# Allegro board cmsis_dap_receive.brd
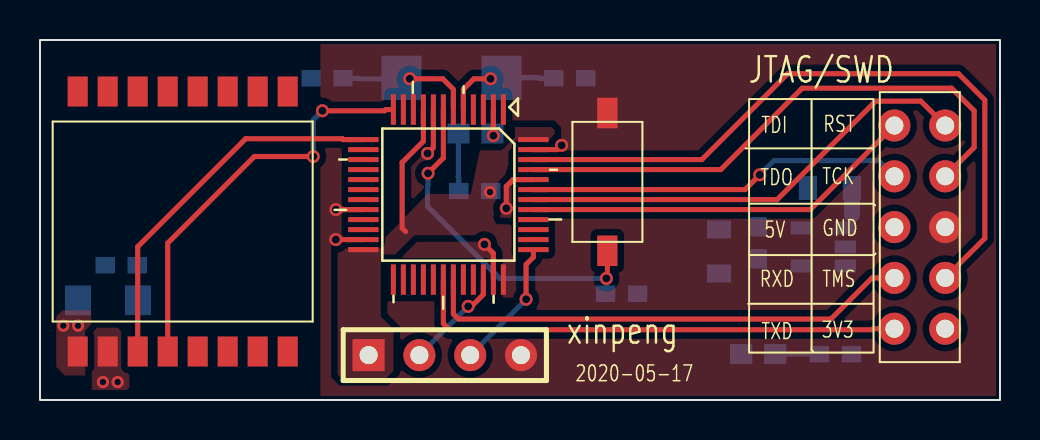
[diagram p0: board, top side]
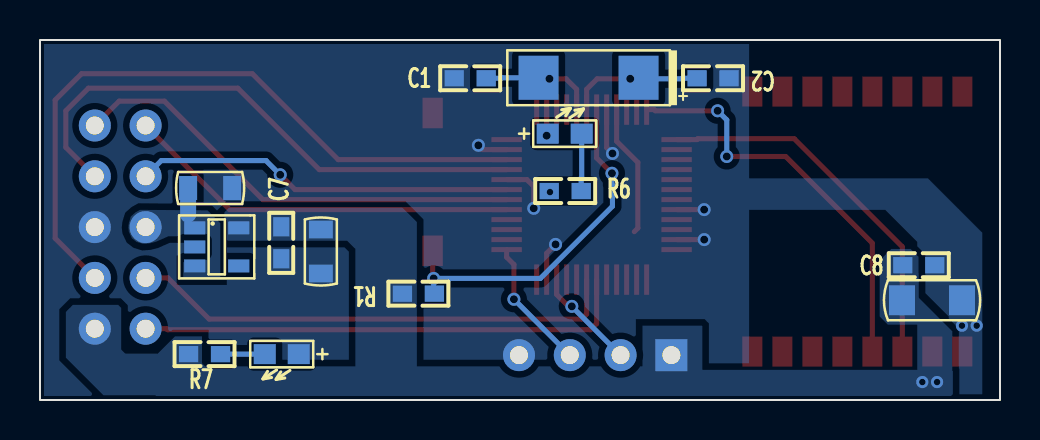
[diagram p1: board, bottom side, seen from below]

Outline 48 x 18 mm; copper layers: TOP, BOTTOM. Coordinates in mm from the lower left corner of the outline.
Outline path: rectangle 0,0 48,18

## Design rules (mm)
constraint set DEFAULT: min track width 0.254

## Placement (name value [footprint] x y rotation side)
C1  20p  [0603]  26.49 16.09 180 bottom
C2  20p  [0603]  14.35 16.09 0 bottom
C4  223  [C0805]  39.49 10.6 180 bottom
C6  223  [C0805]  33.96 7.43 90 bottom
C7  106  [0603]  35.94 7.86 90 bottom
C8  22u  [0603]  4.06 6.74 180 bottom
C9  22u  [C1206]  3.4 4.99 180 bottom
D2  LED  [LED0603]  21.76 13.32 180 bottom
D3  LED  [LED0603]  35.91 2.29 0 bottom
J1  4 HEADER  [SIP4]  16.43 2.24 0 top
J2  CON10C  [DIP5]  43.99 8.64 0 top
R1  10K  [0603]  29.08 5.32 0 bottom
R6  510R  [0603]  21.74 10.45 180 bottom
R7  510R  [0603]  39.77 2.29 180 bottom
SW1  RST  [KEY_SMD]  28.37 10.9 270 top
U1  STM32F103C8T6  [LQFP48]  20.42 10.27 270 top
U2  SPX3819M5-L-3-3  [SOT23-5]  39.16 7.65 270 bottom
U4  HC-25  [HC_25_SMT]  7.13 8.92 90 top
Y1  CRYSTAL13  [50322]  20.57 16.11 0 bottom

## Library data of the parts
C1 C2 C4 C6-C9 = CAP NP
D2 D3 = LED
J1 = 4 HEADER
J2 = CON10C
R1 R6 R7 = RESISTOR
SW1 = SW MAG-SPST/SM
U1 = STM32F103C8T6
U2 = SPX3819M5-L-3-3
U4 = HC-25_0
Y1 = CRYSTAL13_0

## Footprints (pads in the part's own frame, mm; a bottom-side part is the same pattern mirrored in y, then rotated)
0603
  rect 0.965x0.813 smd: 1(-0.8,0) 2(0.8,0)
50322
  rect 2x2.2 smd: 1(-2.5,0) 2(2.5,0)
C0805
  rect 0.9x1.2 smd: 1(-1.1,0) 2(1.1,0)
C1206
  rect 1.3x1.5 smd: 1(-1.5,0) 2(1.5,0)
DIP5
  round 1.6 hole 0.9: 1(-1.27,5.08) 2(-1.27,2.54) 3(-1.27,0) 4(-1.27,-2.54) 5(-1.27,-5.08) 6(1.27,-5.08) 7(1.27,-2.54) 8(1.27,0) 9(1.27,2.54) 10(1.27,5.08)
HC_25_SMT
  rect 1.5x1 smd: 1(-6.5,5.25) 2(-6.5,3.75) 3(-6.5,2.25) 4(-6.5,0.75) 5(-6.5,-0.75) 6(-6.5,-2.25) 7(-6.5,-3.75) 8(-6.5,-5.25) 9(6.5,-5.25) 10(6.5,-3.75) 11(6.5,-2.25) 12(6.5,-0.75) 13(6.5,0.75) 14(6.5,2.25) 15(6.5,3.75) 16(6.5,5.25)
KEY_SMD
  rect 1.524x1.016 smd: 1(-3.445,0) 2(3.445,0)
LED0603
  rect 1.1x1 smd: 1(-0.85,0) 2(0.85,0)
LQFP48
  rect 1.52x0.25 smd: 1(-4.25,2.75) 2(-4.25,2.25) 3(-4.25,1.75) 4(-4.25,1.25) 5(-4.25,0.75) 6(-4.25,0.25) 7(-4.25,-0.25) 8(-4.25,-0.75) 9(-4.25,-1.25) 10(-4.25,-1.75) 11(-4.25,-2.25) 12(-4.25,-2.75) 25(4.25,-2.75) 26(4.25,-2.25) 27(4.25,-1.75) 28(4.25,-1.25) 29(4.25,-0.75) 30(4.25,-0.25) 31(4.25,0.25) 32(4.25,0.75) 33(4.25,1.25) 34(4.25,1.75) 35(4.25,2.25) 36(4.25,2.75)
  rect 0.25x1.52 smd: 13(-2.75,-4.25) 14(-2.25,-4.25) 15(-1.75,-4.25) 16(-1.25,-4.25) 17(-0.75,-4.25) 18(-0.25,-4.25) 19(0.25,-4.25) 20(0.75,-4.25) 21(1.25,-4.25) 22(1.75,-4.25) 23(2.25,-4.25) 24(2.75,-4.25) 37(2.75,4.25) 38(2.25,4.25) 39(1.75,4.25) 40(1.25,4.25) 41(0.75,4.25) 42(0.25,4.25) 43(-0.25,4.25) 44(-0.75,4.25) 45(-1.25,4.25) 46(-1.75,4.25) 47(-2.25,4.25) 48(-2.75,4.25)
SIP4
  rect 1.6x1.6 hole 0.9: 1(0,0)
  round 1.6 hole 0.9: 2(2.54,0) 3(5.08,0) 4(7.62,0)
SOT23-5
  rect 0.65x1.06 smd: 1(-0.95,-1.1) 2(0,-1.1) 3(0.95,-1.1) 4(0.95,1.1) 5(-0.95,1.1)

## Nets
3V3: C6.2 C7.2 C8.1 C9.1 J1.1 J2.6 R1.2 R6.1 R7.1 U1.9 U1.24 U1.36 U1.48 U2.5(VOUT) U4.2(VCC)
5V: C4.1 J2.3 U2.1 U2.3
GND: C1.1 C2.1 C4.2 C6.1 C7.1 C8.2 C9.2 D3.1(CATHODE) J1.4 J2.8 SW1.1 U1.8 U1.20 U1.23 U1.35 U1.44 U1.47(VSS_3) U2.2 U4.1
VBAT: U1.1
CONTROLLER_RX: U1.13 U4.3
CONTROLLER_TX: U1.12 U4.4
PA11: U1.32
PA12: U1.33
PC13: D2.1(CATHODE) U1.2
RST: J2.10 U1.42
RXD: J2.4 U1.31
SWCLK: J1.3 U1.37
SWD: J1.2 U1.34
TCK: J2.9 U1.45
TDI: J2.1 U1.41
TDO/SWO: J2.2 U1.43
TMS: J2.7 U1.46
TXD: J2.5 U1.30
N00886: C1.2 U1.5 Y1.2
N00904: C2.2 U1.6 Y1.1
N01271: R1.1 SW1.2 U1.7
N11949: D2.2 R6.2
N11983: D3.2 R7.2

Pads without a net: U1 3 4 10 11 14 15 16 17 18 19 21 22 25 26 27 28 29 38 39 40; U2 4; U4 5 6 7 8 9 10 11 12 13 14 15 16

## Via types
v1: diameter 0.65, hole 0.4, TOP to BOTTOM, 16 vias
v2: diameter 0.61, hole 0.33, TOP to BOTTOM, 5 vias

## Routing (per net, layer and track width the routed paths; a pad name or vN(x,y) marks a point on that pad's centre or on a via; arc(x,y) is an arc through that point)
3V3: length 6.6
  TOP w0.254: 18.29,8.42 18.11,8.59 18.11,11.88 19.17,12.94 U1.9
  vias: v2(3.15,0.9) v2(3.88,0.9) v2(22.5,10.4)
5V: length 1.3
  BOTTOM w0.8: C4.1 40.59,9.27
GND: length 11.1
  TOP w0.254: U1.20 v1(14.79,9.52) ; v1(23.31,9.58) 23.31,10.68 23.65,11.02 U1.44 ; v1(26.08,12.73) 25.87,12.52 U1.47 ; v1(19.38,12.33) 19.67,12.62 U1.8 ; U1.23 v1(14.79,8.02) ; v1(22.22,7.78) 22.67,7.33 U1.35
  vias: v2(1.17,3.72) v2(1.9,3.72)
CONTROLLER_RX: length 18.8
  TOP w0.254: U4.3 4.88,7.66 10.28,13.06 15.11,13.06 15.15,13.02 U1.13
CONTROLLER_TX: length 20.5
  TOP w0.254: U4.4 6.38,7.84 10.72,12.18 v1(13.66,12.18) ; U1.12 17.29,14.52 17.23,14.46 v1(14.12,14.46)
  BOTTOM w0.254: v1(13.66,12.18) 13.66,14 v1(14.12,14.46)
PC13: length 1.3
  TOP w0.254: U1.2 v1(22.67,13.22)
RST: length 23.1
  TOP w0.254: U1.42 36.86,10.02 41.78,14.94 44.04,14.94 J2.10
RXD: length 24.7
  TOP w0.254: J2.4 41.6,6.1 39.54,4.05 20.92,4.05 20.67,4.3 U1.31
SWCLK: length 6.6
  TOP w0.254: U1.37 24.67,7.14 24.3,6.78 v1(24.3,5.04)
  BOTTOM w0.254: J1.3 v1(24.3,5.04)
SWD: length 5.2
  TOP w0.254: v1(21.41,4.68) 21.51,4.78 21.68,4.78 22.17,5.28 U1.34
  BOTTOM w0.254: J1.2 v1(21.41,4.68)
TCK: length 28.1
  TOP w0.254: U1.45 34.04,11.52 38.11,15.59 45.58,15.59 46.71,14.46 46.71,12.63 J2.9
TDI: length 19.8
  TOP w0.254: J2.1 38.52,9.52 U1.41
TDO/SWO: length 19
  TOP w0.254: v1(35.99,11.26) 35.25,10.52 U1.43
  BOTTOM w0.254: v1(35.99,11.26) 36.7,11.97 41.93,11.97 J2.2
TMS: length 34.6
  TOP w0.254: J2.7 47.24,8.09 47.24,14.99 45.92,16.32 37.39,16.32 33.09,12.02 U1.46
TXD: length 24.9
  TOP w0.254: U1.30 20.17,3.82 20.47,3.51 41.61,3.51 41.67,3.56 J2.5
N00886: length 5.2
  TOP w0.254: v1(22.53,16.06) 21.7,16.06 21.17,15.53 U1.5
  BOTTOM w0.254: Y1.2 24.93,16.11 24.95,16.09 C1.2
N00904: length 7.2
  TOP w0.254: U1.6 20.67,15.53 20.14,16.06 v1(18.49,16.06)
  BOTTOM w0.254: v1(18.49,16.06) 18.12,16.06 ; 18.12,16.06 Y1.1 18.06,16.13 18.06,16.47 ; 18.12,16.06 15.91,16.06 15.88,16.09 C2.2
N01271: length 17.8
  TOP w0.254: U1.7 20.17,12.1 v1(19.4,11.34) ; SW1.2 28.37,6.13 v1(28.32,6.08) 28.27,6.08
  BOTTOM w0.254: R1.1 28.32,5.36 v1(28.32,6.08) 22.98,6.08 19.38,9.69 19.38,10.73 19.4,10.76 v1(19.4,11.34)
N11949: length 2.9
  BOTTOM w0.254: R6.2 20.94,11.11 20.91,11.13 D2.2
N11983: length 2.2
  BOTTOM w0.254: D3.2 R7.2

## Copper pours and planes (outline as drawn; the poured copper is in the pictures)
3V3 on TOP: 16.51,7.34 19.41,10.34 19.53,10.3 21.54,10.3 21.99,12.48 23.09,12.48 23.75,13.14 23.75,13.65 25.57,13.65 25.73,13.5 25.73,13.01 25.55,12.84 23.82,12.84 23.42,12.43 23.42,11.79 22.65,9.15 22.81,8.8 23.49,8.77 23.72,8.54 23.82,5.11 23.29,5.11 22.91,5.14 22.96,7.3 22.45,8.24 18.72,8.24 17.75,7.27 16.56,7.27 16.51,7.32
3V3 on TOP: 2.87,3.62 3.88,3.62 4.06,3.44 4.06,1.66 4.47,1.25 4.47,0.64 4.32,0.5 2.59,0.5 2.59,3.34
3V3 on TOP: 15.11,1.05 17.27,1.05 17.68,1.46 17.68,3.54 17.04,4.17 17.04,7.45 17.09,7.5 16.94,7.65 14.88,7.65 14.88,1.28
3V3 on BOTTOM: 39.9,3.18 41.25,3.18 42.21,2.22 42.21,0.2 2.45,0.2 2.36,0.29 2.36,1.43 2.44,1.51 14.93,1.51 15.11,1.68 39.75,1.68 39.9,1.84
3V3 on BOTTOM: 41.6,0.24 44.83,0.24 46.71,2.12 46.71,4.4 46.35,4.76 44.09,4.76 43.94,4.61 43.94,2.52 43.74,2.32 42.14,2.32 41.6,1.79
3V3 on BOTTOM: 14.88,1.18 14.88,3.69 14.91,3.72 17.88,3.72 17.88,1.3 17.57,1 15.06,1
3V3 on BOTTOM: 29.87,9.61 38.55,9.61 38.78,9.38 38.78,8.14 38.61,7.96 32.64,7.96 32.23,7.55 32.23,0.5 29.43,0.5 29.16,0.77 29.16,8.9
3V3 on BOTTOM: 2.38,1.1 2.38,3.44 4.06,5.11 4.06,7.15 4.47,7.55 5.43,7.55 6.02,6.97 6.02,4.17 5.61,3.77 4.14,3.77 4.14,1.13 4.29,0.97 2.51,0.97
5V on BOTTOM: 39.7,8.19 41.58,8.19 42.21,7.91 42.52,7.83 42.85,7.81 43.18,7.91 43.41,8.09 43.56,8.42 43.58,8.62 43.56,8.85 43.46,9.18 43.23,9.38 43,9.51 39.62,9.48 38.99,8.85 38.99,6.08 40.84,6.08 40.84,6.89 39.93,6.89 39.49,7.37 39.47,7.88 39.67,8.21
GND on TOP: 14.02,17.8 47.8,17.8 47.8,0.2 14.02,0.2 ; 6 cut-outs
GND on TOP: 1.32,1.23 2.28,1.23 2.56,1.51 2.56,4.48 1.11,4.48 0.81,4.17 0.81,1.66 1.29,1.18 1.32,1.2
GND on BOTTOM: 0.89,0.29 2.41,0.29 2.56,0.44 2.56,4.17 4.14,5.75 4.14,7.91 5.74,9.51 13.48,9.51 13.48,10.96 13.36,11.08 3.6,11.08 0.89,8.37
GND on BOTTOM: 12.54,17.8 47.8,17.8 47.8,0.2 12.54,0.2

## Text on the board
Ref Des/Silkscreen Top: 2020-05-17 | RXD | TDO | TDI | TXD | 5V | 3V3 | TCK | GND | TMS | RST | xinpeng | JTAG/SWD
NCLEGEND-1-2: FIGURE | FINISHED_SIZE | 0.3302 | 0.4 | 0.9 | DRILL CHART: TOP to BOTTOM | ALL UNITS ARE IN MILLIMETERS | PLATED | QTY | 5 | 16 | 1 | 13
